# Altium PCB PCB_mecha-io-extension_2025-06-03.pcbdoc (part 1 of 2)
Units mil, origin at the board's own origin, x right, y up, seen from the top; angles counter-clockwise.
Board outline 3960 x 3230.45 mil, 2 copper layers (Top Layer, Bottom Layer); 20 components, 61 nets, 117 pads, 59 vias.
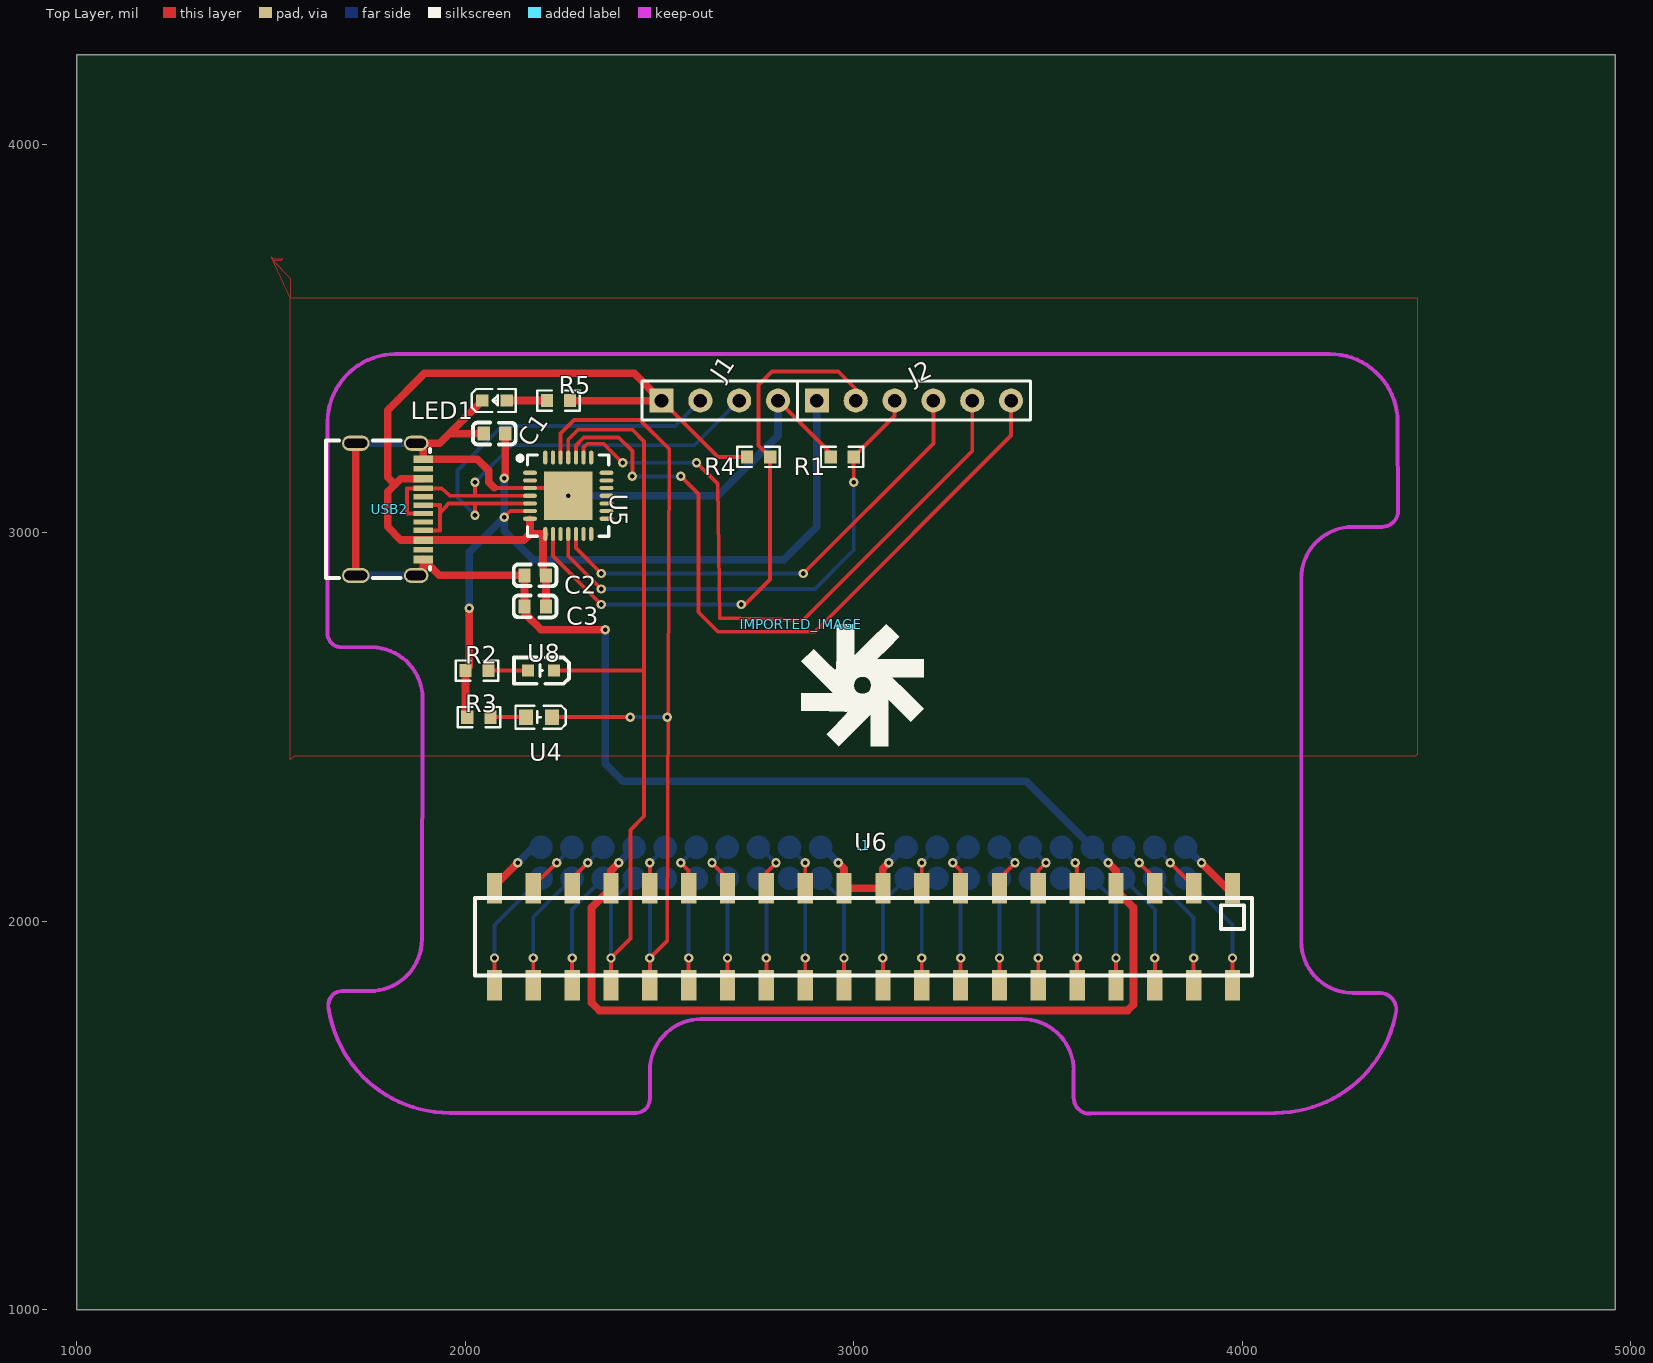
[diagram p0: Top Layer view]
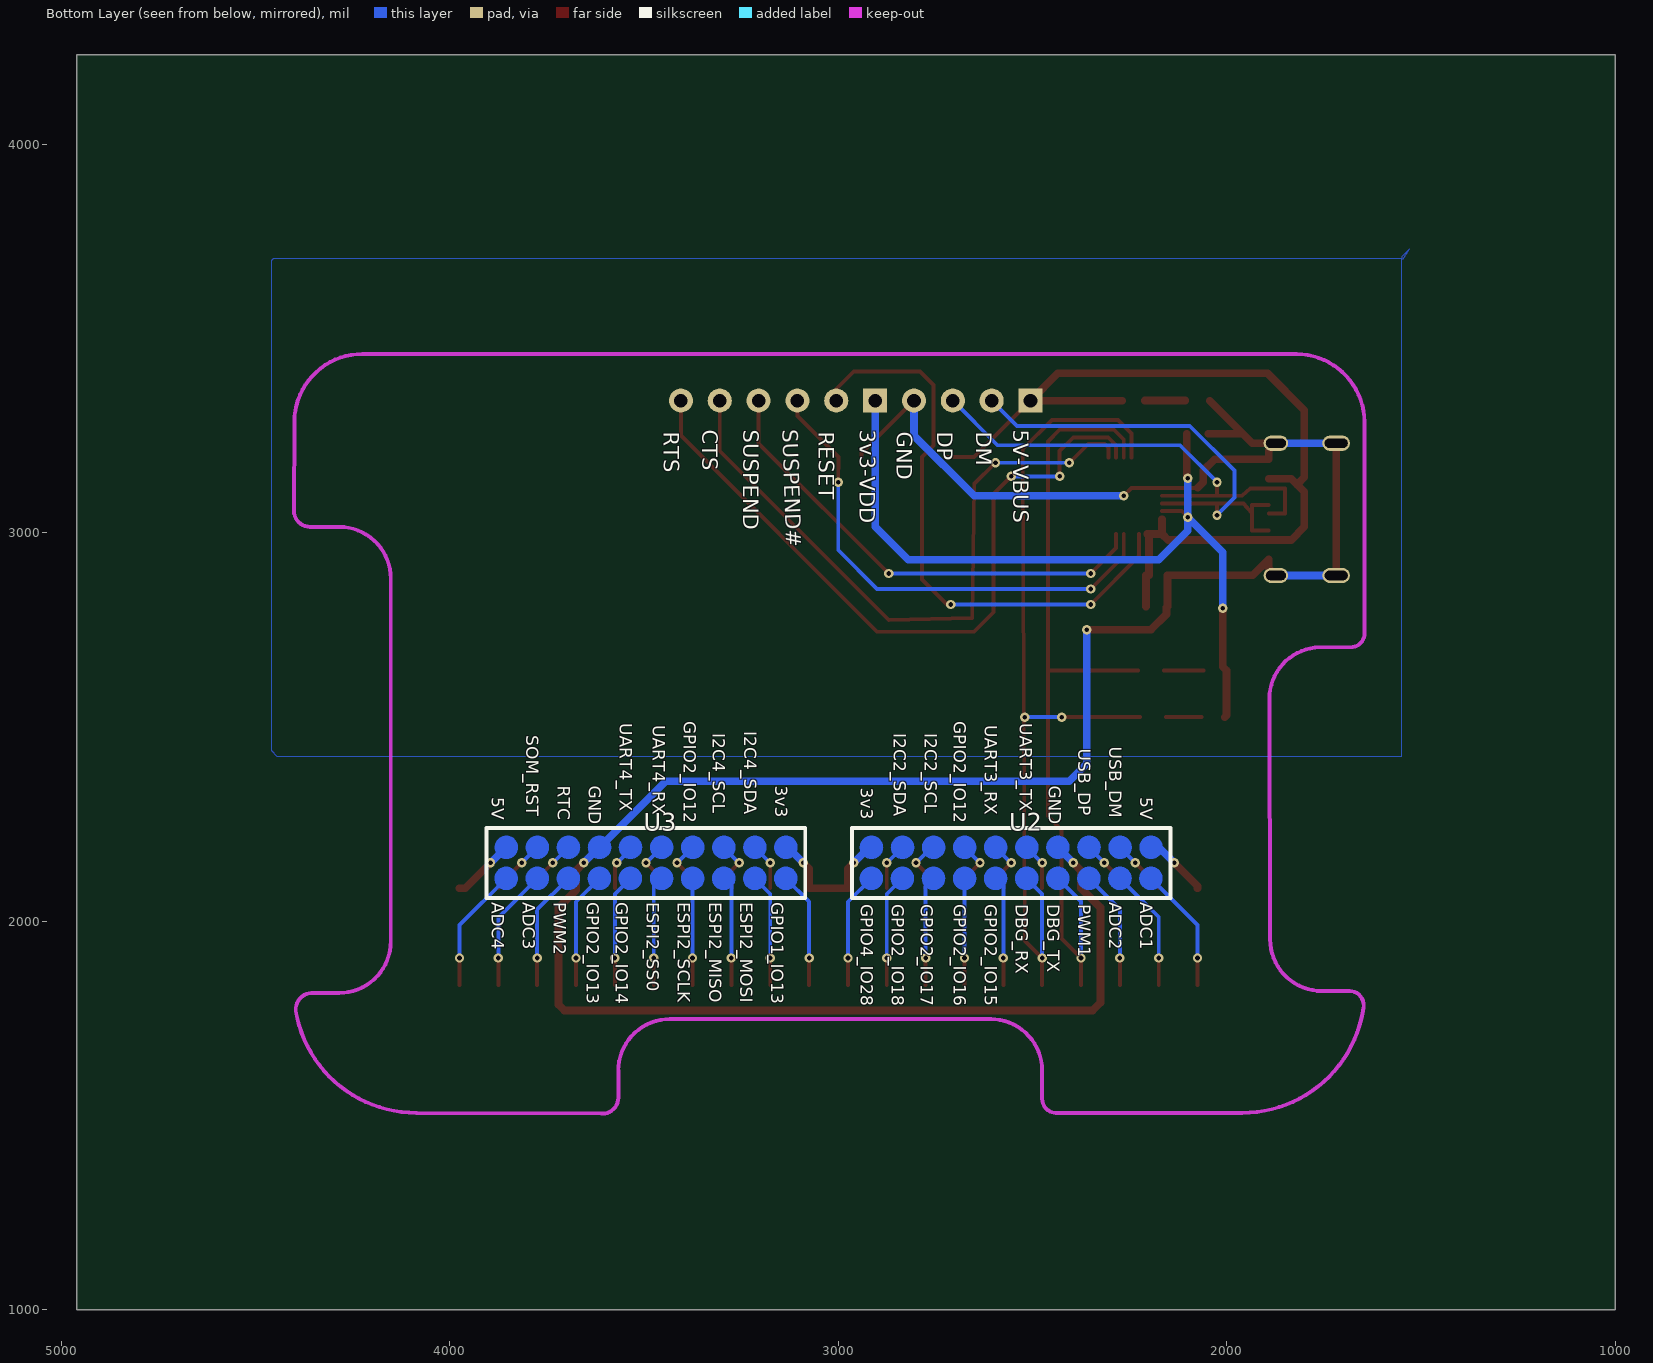
[diagram p1: Bottom Layer view, seen from below]

## Layer stack, top to bottom
Top Solder: solder mask 0.4, Solder Resist, Dk 3.5
Top Layer: signal copper 1.4
Dielectric1: dielectric 12.6, FR-4, Dk 4.8
Bottom Layer: signal copper 1.4
Bottom Solder: solder mask 0.4, Solder Resist, Dk 3.5

## Board outline
4960,1000 1000,1000 1000,4230.45 4960,4230.45

## Design rules (kind name [scope] priority, off if disabled: settings)
Clearance [All] p1: gap=10 ignorepadtopadclearanceinfootprint=FALSE except(0: Arc-Hole Track-Hole SMDPad-Hole THPad-Hole Via-Hole Fill-Hole Poly-Hole Region-Hole Text-Hole)
PolygonConnect [All] p1: connectstyle=Relief reliefconductorwidth=10 reliefentries=4 polygonreliefangle="90 Angle" airgapwidth=10
RoutingVias [All] p1: holewidth=28 width=50 viastyle="Through Hole" minholewidth=28 minwidth=50 maxholewidth=28 maxwidth=50
SolderMaskExpansion [All] p1: expansion=4 istentingtop=FALSE
Width [All] p1: maxlimit=10 minlimit=10 preferedwidth=10
30 further rules are at their usual default settings.

## Components (designator, comment, footprint, x,y, rotation, side; value= is the part's Value field where it differs from the comment)
.1 "_" ? 3025,2195.45 r0 top locked
C1 "4.7uF" C0603 2075,3255.45 r0 top
C2 "4.7uF" C0603 2180,2890.45 r0 top
C3 "4.7uF" C0603 2180,2810.45 r0 top
IMPORTED_IMAGE "Comment" IMPORTED_IMAGE 2865,2765.29 r0 top
J1 "HDR-M-2.54_1x4" HDR-M-2.54_1X4 2655,3340.45 r0 top
J2 "HDR-M-2.54_1x6" HDR-M-2.54_1X6 3155,3340.45 r0 top
LED1 "HL-PST-1608S9AC-04" LED0603-RD_RED 2075,3340.45 r0 top
R1 "10kΩ" R0603 2970,3195.45 r0 top
R2 "1kΩ" R0603 2030,2645.45 r180 top
R3 "1kΩ" R0603 2035,2525.45 r180 top
R4 "4.7kΩ" R0603 2755,3195.45 r180 top
R5 "R0603" R0603 2240,3340.45 r0 top
U2 "10x2-Pogo-Pins-Pads-2mm-Pitch" 10X2-POGO-PINS-PADS-2MM-PITCH 2555,2150.45 r0 bottom
U3 "10x2-Pogo-Pins-Pads-2mm-Pitch" 10X2-POGO-PINS-PADS-2MM-PITCH 3495,2150.45 r0 bottom
U4 "19-213/GHC-XS1T1N/5T" LED0603-FD_GREEN 2190,2525.45 r0 top
U5 "CP2102-GMR" WQFN-28_L5.0-W5.0-P0.50-BL-EP3.2 2265,3095.45 r270 top
U6 "mecha_gpio_40pin_header" MECHA_GPIO_40PIN_HEADER 3025,1955.45 r0 top
U8 "A-SP194B1C-C03-4T" LED0603-R-RD_BLUE 2195,2645.45 r180 top
USB2 "TYPE-C-31-M-23" USB-C-SMD_TYPE-C-31-M-23 1805,3060.45 r270 top

## Footprints (in the part's own frame and the unit in brackets; to place one, negate y for a bottom-side part, rotate by r counter-clockwise, add the part's x,y. Pads: shape width x height; smd on the part's side, far side on the other; paste and mask are expansions set on the pad)
10X2-POGO-PINS-PADS-2MM-PITCH [mil]
  Top Layer region: -390,-40 -389.96,-41.56 -389.84,-43.11 -389.63,-44.65 -389.35,-46.18 -388.99,-47.69 -388.55,-49.18 -388.03,-50.65 -387.43,-52.09 -386.76,-53.49 -386.02,-54.86 -385.2,-56.19 -384.32,-57.47 -383.38,-58.71 -382.37,-59.89 -381.29,-61.02 -380.16,-62.09 -378.98,-63.1 -377.75,-64.05 -376.47,-64.93 -375.14,-65.74 -373.77,-66.49 -372.37,-67.16 -370.93,-67.75 -369.46,-68.27 -367.97,-68.71 -366.46,-69.07 -364.93,-69.36 -363.38,-69.56 -361.83,-69.68 -360.28,-69.72 -358.72,-69.68 -357.17,-69.56 -355.63,-69.36 -354.1,-69.07 -352.58,-68.71 -351.09,-68.27 -349.62,-67.75 -348.18,-67.16 -346.78,-66.49 -345.41,-65.74 -344.09,-64.93 -342.8,-64.05 -341.57,-63.1 -340.39,-62.09 -339.26,-61.02 -338.19,-59.89 -337.18,-58.71 -336.23,-57.47 -335.35,-56.19 -334.53,-54.86 -333.79,-53.49 -333.12,-52.09 -332.53,-50.65 -332.01,-49.18 -331.56,-47.69 -331.2,-46.18 -330.92,-44.65 -330.71,-43.11 -330.59,-41.56 -330.55,-40 -330.59,-38.44 -330.71,-36.89 -330.92,-35.35 -331.2,-33.82 -331.56,-32.31 -332.01,-30.82 -332.53,-29.35 -333.12,-27.91 -333.79,-26.51 -334.53,-25.14 -335.35,-23.81 -336.23,-22.53 -337.18,-21.29 -338.19,-20.11 -339.26,-18.98 -340.39,-17.91 -341.57,-16.9 -342.8,-15.95 -344.09,-15.07 -345.41,-14.26 -346.78,-13.51 -348.18,-12.84 -349.62,-12.25 -351.09,-11.73 -352.58,-11.29 -354.1,-10.93 -355.63,-10.64 -357.17,-10.44 -358.72,-10.32 -360.28,-10.28 -361.83,-10.32 -363.38,-10.44 -364.93,-10.64 -366.46,-10.93 -367.97,-11.29 -369.46,-11.73 -370.93,-12.25 -372.37,-12.84 -373.77,-13.51 -375.14,-14.26 -376.47,-15.07 -377.75,-15.95 -378.98,-16.9 -380.16,-17.91 -381.29,-18.98 -382.37,-20.11 -383.38,-21.29 -384.32,-22.53 -385.2,-23.81 -386.02,-25.14 -386.76,-26.51 -387.43,-27.91 -388.03,-29.35 -388.55,-30.82 -388.99,-32.31 -389.35,-33.82 -389.63,-35.35 -389.84,-36.89 -389.96,-38.44
  Top Layer region: -310.28,-40 -310.24,-41.56 -310.11,-43.11 -309.91,-44.65 -309.63,-46.18 -309.26,-47.69 -308.82,-49.18 -308.3,-50.65 -307.71,-52.09 -307.04,-53.49 -306.29,-54.86 -305.48,-56.19 -304.6,-57.47 -303.65,-58.71 -302.64,-59.89 -301.57,-61.02 -300.44,-62.09 -299.26,-63.1 -298.02,-64.05 -296.74,-64.93 -295.41,-65.74 -294.05,-66.49 -292.64,-67.16 -291.2,-67.75 -289.74,-68.27 -288.24,-68.71 -286.73,-69.07 -285.2,-69.36 -283.66,-69.56 -282.11,-69.68 -280.55,-69.72 -279,-69.68 -277.44,-69.56 -275.9,-69.36 -274.37,-69.07 -272.86,-68.71 -271.37,-68.27 -269.9,-67.75 -268.46,-67.16 -267.06,-66.49 -265.69,-65.74 -264.36,-64.93 -263.08,-64.05 -261.85,-63.1 -260.66,-62.09 -259.53,-61.02 -258.46,-59.89 -257.45,-58.71 -256.5,-57.47 -255.62,-56.19 -254.81,-54.86 -254.07,-53.49 -253.4,-52.09 -252.8,-50.65 -252.28,-49.18 -251.84,-47.69 -251.48,-46.18 -251.19,-44.65 -250.99,-43.11 -250.87,-41.56 -250.83,-40 -250.87,-38.44 -250.99,-36.89 -251.19,-35.35 -251.48,-33.82 -251.84,-32.31 -252.28,-30.82 -252.8,-29.35 -253.4,-27.91 -254.07,-26.51 -254.81,-25.14 -255.62,-23.81 -256.5,-22.53 -257.45,-21.29 -258.46,-20.11 -259.53,-18.98 -260.66,-17.91 -261.85,-16.9 -263.08,-15.95 -264.36,-15.07 -265.69,-14.26 -267.06,-13.51 -268.46,-12.84 -269.9,-12.25 -271.37,-11.73 -272.86,-11.29 -274.37,-10.93 -275.9,-10.64 -277.44,-10.44 -279,-10.32 -280.55,-10.28 -282.11,-10.32 -283.66,-10.44 -285.2,-10.64 -286.73,-10.93 -288.24,-11.29 -289.74,-11.73 -291.2,-12.25 -292.64,-12.84 -294.05,-13.51 -295.41,-14.26 -296.74,-15.07 -298.02,-15.95 -299.26,-16.9 -300.44,-17.91 -301.57,-18.98 -302.64,-20.11 -303.65,-21.29 -304.6,-22.53 -305.48,-23.81 -306.29,-25.14 -307.04,-26.51 -307.71,-27.91 -308.3,-29.35 -308.82,-30.82 -309.26,-32.31 -309.63,-33.82 -309.91,-35.35 -310.11,-36.89 -310.24,-38.44
  Top Layer region: -230.28,-40 -230.24,-41.56 -230.11,-43.11 -229.91,-44.65 -229.63,-46.18 -229.26,-47.69 -228.82,-49.18 -228.3,-50.65 -227.71,-52.09 -227.04,-53.49 -226.29,-54.86 -225.48,-56.19 -224.6,-57.47 -223.65,-58.71 -222.64,-59.89 -221.57,-61.02 -220.44,-62.09 -219.26,-63.1 -218.02,-64.05 -216.74,-64.93 -215.41,-65.74 -214.05,-66.49 -212.64,-67.16 -211.2,-67.75 -209.74,-68.27 -208.24,-68.71 -206.73,-69.07 -205.2,-69.36 -203.66,-69.56 -202.11,-69.68 -200.55,-69.72 -199,-69.68 -197.44,-69.56 -195.9,-69.36 -194.37,-69.07 -192.86,-68.71 -191.37,-68.27 -189.9,-67.75 -188.46,-67.16 -187.06,-66.49 -185.69,-65.74 -184.36,-64.93 -183.08,-64.05 -181.85,-63.1 -180.66,-62.09 -179.53,-61.02 -178.46,-59.89 -177.45,-58.71 -176.5,-57.47 -175.62,-56.19 -174.81,-54.86 -174.07,-53.49 -173.4,-52.09 -172.8,-50.65 -172.28,-49.18 -171.84,-47.69 -171.48,-46.18 -171.19,-44.65 -170.99,-43.11 -170.87,-41.56 -170.83,-40 -170.87,-38.44 -170.99,-36.89 -171.19,-35.35 -171.48,-33.82 -171.84,-32.31 -172.28,-30.82 -172.8,-29.35 -173.4,-27.91 -174.07,-26.51 -174.81,-25.14 -175.62,-23.81 -176.5,-22.53 -177.45,-21.29 -178.46,-20.11 -179.53,-18.98 -180.66,-17.91 -181.85,-16.9 -183.08,-15.95 -184.36,-15.07 -185.69,-14.26 -187.06,-13.51 -188.46,-12.84 -189.9,-12.25 -191.37,-11.73 -192.86,-11.29 -194.37,-10.93 -195.9,-10.64 -197.44,-10.44 -199,-10.32 -200.55,-10.28 -202.11,-10.32 -203.66,-10.44 -205.2,-10.64 -206.73,-10.93 -208.24,-11.29 -209.74,-11.73 -211.2,-12.25 -212.64,-12.84 -214.05,-13.51 -215.41,-14.26 -216.74,-15.07 -218.02,-15.95 -219.26,-16.9 -220.44,-17.91 -221.57,-18.98 -222.64,-20.11 -223.65,-21.29 -224.6,-22.53 -225.48,-23.81 -226.29,-25.14 -227.04,-26.51 -227.71,-27.91 -228.3,-29.35 -228.82,-30.82 -229.26,-32.31 -229.63,-33.82 -229.91,-35.35 -230.11,-36.89 -230.24,-38.44
  Top Layer region: -150.28,-40 -150.24,-41.56 -150.11,-43.11 -149.91,-44.65 -149.63,-46.18 -149.26,-47.69 -148.82,-49.18 -148.3,-50.65 -147.71,-52.09 -147.04,-53.49 -146.29,-54.86 -145.48,-56.19 -144.6,-57.47 -143.65,-58.71 -142.64,-59.89 -141.57,-61.02 -140.44,-62.09 -139.26,-63.1 -138.02,-64.05 -136.74,-64.93 -135.41,-65.74 -134.05,-66.49 -132.64,-67.16 -131.2,-67.75 -129.74,-68.27 -128.24,-68.71 -126.73,-69.07 -125.2,-69.36 -123.66,-69.56 -122.11,-69.68 -120.55,-69.72 -119,-69.68 -117.44,-69.56 -115.9,-69.36 -114.37,-69.07 -112.86,-68.71 -111.37,-68.27 -109.9,-67.75 -108.46,-67.16 -107.06,-66.49 -105.69,-65.74 -104.36,-64.93 -103.08,-64.05 -101.85,-63.1 -100.66,-62.09 -99.53,-61.02 -98.46,-59.89 -97.45,-58.71 -96.5,-57.47 -95.62,-56.19 -94.81,-54.86 -94.07,-53.49 -93.4,-52.09 -92.8,-50.65 -92.28,-49.18 -91.84,-47.69 -91.48,-46.18 -91.19,-44.65 -90.99,-43.11 -90.87,-41.56 -90.83,-40 -90.87,-38.44 -90.99,-36.89 -91.19,-35.35 -91.48,-33.82 -91.84,-32.31 -92.28,-30.82 -92.8,-29.35 -93.4,-27.91 -94.07,-26.51 -94.81,-25.14 -95.62,-23.81 -96.5,-22.53 -97.45,-21.29 -98.46,-20.11 -99.53,-18.98 -100.66,-17.91 -101.85,-16.9 -103.08,-15.95 -104.36,-15.07 -105.69,-14.26 -107.06,-13.51 -108.46,-12.84 -109.9,-12.25 -111.37,-11.73 -112.86,-11.29 -114.37,-10.93 -115.9,-10.64 -117.44,-10.44 -119,-10.32 -120.55,-10.28 -122.11,-10.32 -123.66,-10.44 -125.2,-10.64 -126.73,-10.93 -128.24,-11.29 -129.74,-11.73 -131.2,-12.25 -132.64,-12.84 -134.05,-13.51 -135.41,-14.26 -136.74,-15.07 -138.02,-15.95 -139.26,-16.9 -140.44,-17.91 -141.57,-18.98 -142.64,-20.11 -143.65,-21.29 -144.6,-22.53 -145.48,-23.81 -146.29,-25.14 -147.04,-26.51 -147.71,-27.91 -148.3,-29.35 -148.82,-30.82 -149.26,-32.31 -149.63,-33.82 -149.91,-35.35 -150.11,-36.89 -150.24,-38.44
  Top Layer region: -70.28,-40 -70.24,-41.56 -70.11,-43.11 -69.91,-44.65 -69.63,-46.18 -69.26,-47.69 -68.82,-49.18 -68.3,-50.65 -67.71,-52.09 -67.04,-53.49 -66.29,-54.86 -65.48,-56.19 -64.6,-57.47 -63.65,-58.71 -62.64,-59.89 -61.57,-61.02 -60.44,-62.09 -59.26,-63.1 -58.02,-64.05 -56.74,-64.93 -55.41,-65.74 -54.05,-66.49 -52.64,-67.16 -51.2,-67.75 -49.74,-68.27 -48.24,-68.71 -46.73,-69.07 -45.2,-69.36 -43.66,-69.56 -42.11,-69.68 -40.55,-69.72 -39,-69.68 -37.44,-69.56 -35.9,-69.36 -34.37,-69.07 -32.86,-68.71 -31.37,-68.27 -29.9,-67.75 -28.46,-67.16 -27.06,-66.49 -25.69,-65.74 -24.36,-64.93 -23.08,-64.05 -21.85,-63.1 -20.66,-62.09 -19.53,-61.02 -18.46,-59.89 -17.45,-58.71 -16.5,-57.47 -15.62,-56.19 -14.81,-54.86 -14.07,-53.49 -13.4,-52.09 -12.8,-50.65 -12.28,-49.18 -11.84,-47.69 -11.48,-46.18 -11.19,-44.65 -10.99,-43.11 -10.87,-41.56 -10.83,-40 -10.87,-38.44 -10.99,-36.89 -11.19,-35.35 -11.48,-33.82 -11.84,-32.31 -12.28,-30.82 -12.8,-29.35 -13.4,-27.91 -14.07,-26.51 -14.81,-25.14 -15.62,-23.81 -16.5,-22.53 -17.45,-21.29 -18.46,-20.11 -19.53,-18.98 -20.66,-17.91 -21.85,-16.9 -23.08,-15.95 -24.36,-15.07 -25.69,-14.26 -27.06,-13.51 -28.46,-12.84 -29.9,-12.25 -31.37,-11.73 -32.86,-11.29 -34.37,-10.93 -35.9,-10.64 -37.44,-10.44 -39,-10.32 -40.55,-10.28 -42.11,-10.32 -43.66,-10.44 -45.2,-10.64 -46.73,-10.93 -48.24,-11.29 -49.74,-11.73 -51.2,-12.25 -52.64,-12.84 -54.05,-13.51 -55.41,-14.26 -56.74,-15.07 -58.02,-15.95 -59.26,-16.9 -60.44,-17.91 -61.57,-18.98 -62.64,-20.11 -63.65,-21.29 -64.6,-22.53 -65.48,-23.81 -66.29,-25.14 -67.04,-26.51 -67.71,-27.91 -68.3,-29.35 -68.82,-30.82 -69.26,-32.31 -69.63,-33.82 -69.91,-35.35 -70.11,-36.89 -70.24,-38.44
  Top Layer region: 10,-40 10.04,-41.56 10.16,-43.11 10.37,-44.65 10.65,-46.18 11.01,-47.69 11.45,-49.18 11.97,-50.65 12.57,-52.09 13.24,-53.49 13.98,-54.86 14.8,-56.19 15.68,-57.47 16.62,-58.71 17.63,-59.89 18.71,-61.02 19.84,-62.09 21.02,-63.1 22.25,-64.05 23.53,-64.93 24.86,-65.74 26.23,-66.49 27.63,-67.16 29.07,-67.75 30.54,-68.27 32.03,-68.71 33.54,-69.07 35.07,-69.36 36.62,-69.56 38.17,-69.68 39.72,-69.72 41.28,-69.68 42.83,-69.56 44.37,-69.36 45.9,-69.07 47.42,-68.71 48.91,-68.27 50.38,-67.75 51.82,-67.16 53.22,-66.49 54.59,-65.74 55.91,-64.93 57.2,-64.05 58.43,-63.1 59.61,-62.09 60.74,-61.02 61.81,-59.89 62.82,-58.71 63.77,-57.47 64.65,-56.19 65.47,-54.86 66.21,-53.49 66.88,-52.09 67.47,-50.65 67.99,-49.18 68.44,-47.69 68.8,-46.18 69.08,-44.65 69.29,-43.11 69.41,-41.56 69.45,-40 69.41,-38.44 69.29,-36.89 69.08,-35.35 68.8,-33.82 68.44,-32.31 67.99,-30.82 67.47,-29.35 66.88,-27.91 66.21,-26.51 65.47,-25.14 64.65,-23.81 63.77,-22.53 62.82,-21.29 61.81,-20.11 60.74,-18.98 59.61,-17.91 58.43,-16.9 57.2,-15.95 55.91,-15.07 54.59,-14.26 53.22,-13.51 51.82,-12.84 50.38,-12.25 48.91,-11.73 47.42,-11.29 45.9,-10.93 44.37,-10.64 42.83,-10.44 41.28,-10.32 39.72,-10.28 38.17,-10.32 36.62,-10.44 35.07,-10.64 33.54,-10.93 32.03,-11.29 30.54,-11.73 29.07,-12.25 27.63,-12.84 26.23,-13.51 24.86,-14.26 23.53,-15.07 22.25,-15.95 21.02,-16.9 19.84,-17.91 18.71,-18.98 17.63,-20.11 16.62,-21.29 15.68,-22.53 14.8,-23.81 13.98,-25.14 13.24,-26.51 12.57,-27.91 11.97,-29.35 11.45,-30.82 11.01,-32.31 10.65,-33.82 10.37,-35.35 10.16,-36.89 10.04,-38.44
  Top Layer region: 89.72,-40 89.76,-41.56 89.89,-43.11 90.09,-44.65 90.37,-46.18 90.74,-47.69 91.18,-49.18 91.7,-50.65 92.29,-52.09 92.96,-53.49 93.71,-54.86 94.52,-56.19 95.4,-57.47 96.35,-58.71 97.36,-59.89 98.43,-61.02 99.56,-62.09 100.74,-63.1 101.98,-64.05 103.26,-64.93 104.59,-65.74 105.95,-66.49 107.36,-67.16 108.8,-67.75 110.26,-68.27 111.76,-68.71 113.27,-69.07 114.8,-69.36 116.34,-69.56 117.89,-69.68 119.45,-69.72 121,-69.68 122.56,-69.56 124.1,-69.36 125.63,-69.07 127.14,-68.71 128.63,-68.27 130.1,-67.75 131.54,-67.16 132.94,-66.49 134.31,-65.74 135.64,-64.93 136.92,-64.05 138.15,-63.1 139.34,-62.09 140.47,-61.02 141.54,-59.89 142.55,-58.71 143.5,-57.47 144.38,-56.19 145.19,-54.86 145.93,-53.49 146.6,-52.09 147.2,-50.65 147.72,-49.18 148.16,-47.69 148.52,-46.18 148.81,-44.65 149.01,-43.11 149.13,-41.56 149.17,-40 149.13,-38.44 149.01,-36.89 148.81,-35.35 148.52,-33.82 148.16,-32.31 147.72,-30.82 147.2,-29.35 146.6,-27.91 145.93,-26.51 145.19,-25.14 144.38,-23.81 143.5,-22.53 142.55,-21.29 141.54,-20.11 140.47,-18.98 139.34,-17.91 138.15,-16.9 136.92,-15.95 135.64,-15.07 134.31,-14.26 132.94,-13.51 131.54,-12.84 130.1,-12.25 128.63,-11.73 127.14,-11.29 125.63,-10.93 124.1,-10.64 122.56,-10.44 121,-10.32 119.45,-10.28 117.89,-10.32 116.34,-10.44 114.8,-10.64 113.27,-10.93 111.76,-11.29 110.26,-11.73 108.8,-12.25 107.36,-12.84 105.95,-13.51 104.59,-14.26 103.26,-15.07 101.98,-15.95 100.74,-16.9 99.56,-17.91 98.43,-18.98 97.36,-20.11 96.35,-21.29 95.4,-22.53 94.52,-23.81 93.71,-25.14 92.96,-26.51 92.29,-27.91 91.7,-29.35 91.18,-30.82 90.74,-32.31 90.37,-33.82 90.09,-35.35 89.89,-36.89 89.76,-38.44
  Top Layer region: 169.72,-40 169.76,-41.56 169.89,-43.11 170.09,-44.65 170.37,-46.18 170.74,-47.69 171.18,-49.18 171.7,-50.65 172.29,-52.09 172.96,-53.49 173.71,-54.86 174.52,-56.19 175.4,-57.47 176.35,-58.71 177.36,-59.89 178.43,-61.02 179.56,-62.09 180.74,-63.1 181.98,-64.05 183.26,-64.93 184.59,-65.74 185.95,-66.49 187.36,-67.16 188.8,-67.75 190.26,-68.27 191.76,-68.71 193.27,-69.07 194.8,-69.36 196.34,-69.56 197.89,-69.68 199.45,-69.72 201,-69.68 202.56,-69.56 204.1,-69.36 205.63,-69.07 207.14,-68.71 208.63,-68.27 210.1,-67.75 211.54,-67.16 212.94,-66.49 214.31,-65.74 215.64,-64.93 216.92,-64.05 218.15,-63.1 219.34,-62.09 220.47,-61.02 221.54,-59.89 222.55,-58.71 223.5,-57.47 224.38,-56.19 225.19,-54.86 225.93,-53.49 226.6,-52.09 227.2,-50.65 227.72,-49.18 228.16,-47.69 228.52,-46.18 228.81,-44.65 229.01,-43.11 229.13,-41.56 229.17,-40 229.13,-38.44 229.01,-36.89 228.81,-35.35 228.52,-33.82 228.16,-32.31 227.72,-30.82 227.2,-29.35 226.6,-27.91 225.93,-26.51 225.19,-25.14 224.38,-23.81 223.5,-22.53 222.55,-21.29 221.54,-20.11 220.47,-18.98 219.34,-17.91 218.15,-16.9 216.92,-15.95 215.64,-15.07 214.31,-14.26 212.94,-13.51 211.54,-12.84 210.1,-12.25 208.63,-11.73 207.14,-11.29 205.63,-10.93 204.1,-10.64 202.56,-10.44 201,-10.32 199.45,-10.28 197.89,-10.32 196.34,-10.44 194.8,-10.64 193.27,-10.93 191.76,-11.29 190.26,-11.73 188.8,-12.25 187.36,-12.84 185.95,-13.51 184.59,-14.26 183.26,-15.07 181.98,-15.95 180.74,-16.9 179.56,-17.91 178.43,-18.98 177.36,-20.11 176.35,-21.29 175.4,-22.53 174.52,-23.81 173.71,-25.14 172.96,-26.51 172.29,-27.91 171.7,-29.35 171.18,-30.82 170.74,-32.31 170.37,-33.82 170.09,-35.35 169.89,-36.89 169.76,-38.44
  Top Layer region: 249.72,-40 249.76,-41.56 249.89,-43.11 250.09,-44.65 250.37,-46.18 250.74,-47.69 251.18,-49.18 251.7,-50.65 252.29,-52.09 252.96,-53.49 253.71,-54.86 254.52,-56.19 255.4,-57.47 256.35,-58.71 257.36,-59.89 258.43,-61.02 259.56,-62.09 260.74,-63.1 261.98,-64.05 263.26,-64.93 264.59,-65.74 265.95,-66.49 267.36,-67.16 268.8,-67.75 270.26,-68.27 271.76,-68.71 273.27,-69.07 274.8,-69.36 276.34,-69.56 277.89,-69.68 279.45,-69.72 281,-69.68 282.56,-69.56 284.1,-69.36 285.63,-69.07 287.14,-68.71 288.63,-68.27 290.1,-67.75 291.54,-67.16 292.94,-66.49 294.31,-65.74 295.64,-64.93 296.92,-64.05 298.15,-63.1 299.34,-62.09 300.47,-61.02 301.54,-59.89 302.55,-58.71 303.5,-57.47 304.38,-56.19 305.19,-54.86 305.93,-53.49 306.6,-52.09 307.2,-50.65 307.72,-49.18 308.16,-47.69 308.52,-46.18 308.81,-44.65 309.01,-43.11 309.13,-41.56 309.17,-40 309.13,-38.44 309.01,-36.89 308.81,-35.35 308.52,-33.82 308.16,-32.31 307.72,-30.82 307.2,-29.35 306.6,-27.91 305.93,-26.51 305.19,-25.14 304.38,-23.81 303.5,-22.53 302.55,-21.29 301.54,-20.11 300.47,-18.98 299.34,-17.91 298.15,-16.9 296.92,-15.95 295.64,-15.07 294.31,-14.26 292.94,-13.51 291.54,-12.84 290.1,-12.25 288.63,-11.73 287.14,-11.29 285.63,-10.93 284.1,-10.64 282.56,-10.44 281,-10.32 279.45,-10.28 277.89,-10.32 276.34,-10.44 274.8,-10.64 273.27,-10.93 271.76,-11.29 270.26,-11.73 268.8,-12.25 267.36,-12.84 265.95,-13.51 264.59,-14.26 263.26,-15.07 261.98,-15.95 260.74,-16.9 259.56,-17.91 258.43,-18.98 257.36,-20.11 256.35,-21.29 255.4,-22.53 254.52,-23.81 253.71,-25.14 252.96,-26.51 252.29,-27.91 251.7,-29.35 251.18,-30.82 250.74,-32.31 250.37,-33.82 250.09,-35.35 249.89,-36.89 249.76,-38.44
  Top Layer region: 329.72,-40 329.76,-41.56 329.89,-43.11 330.09,-44.65 330.37,-46.18 330.74,-47.69 331.18,-49.18 331.7,-50.65 332.29,-52.09 332.96,-53.49 333.71,-54.86 334.52,-56.19 335.4,-57.47 336.35,-58.71 337.36,-59.89 338.43,-61.02 339.56,-62.09 340.74,-63.1 341.98,-64.05 343.26,-64.93 344.59,-65.74 345.95,-66.49 347.36,-67.16 348.8,-67.75 350.26,-68.27 351.76,-68.71 353.27,-69.07 354.8,-69.36 356.34,-69.56 357.89,-69.68 359.45,-69.72 361,-69.68 362.56,-69.56 364.1,-69.36 365.63,-69.07 367.14,-68.71 368.63,-68.27 370.1,-67.75 371.54,-67.16 372.94,-66.49 374.31,-65.74 375.64,-64.93 376.92,-64.05 378.15,-63.1 379.34,-62.09 380.47,-61.02 381.54,-59.89 382.55,-58.71 383.5,-57.47 384.38,-56.19 385.19,-54.86 385.93,-53.49 386.6,-52.09 387.2,-50.65 387.72,-49.18 388.16,-47.69 388.52,-46.18 388.81,-44.65 389.01,-43.11 389.13,-41.56 389.17,-40 389.13,-38.44 389.01,-36.89 388.81,-35.35 388.52,-33.82 388.16,-32.31 387.72,-30.82 387.2,-29.35 386.6,-27.91 385.93,-26.51 385.19,-25.14 384.38,-23.81 383.5,-22.53 382.55,-21.29 381.54,-20.11 380.47,-18.98 379.34,-17.91 378.15,-16.9 376.92,-15.95 375.64,-15.07 374.31,-14.26 372.94,-13.51 371.54,-12.84 370.1,-12.25 368.63,-11.73 367.14,-11.29 365.63,-10.93 364.1,-10.64 362.56,-10.44 361,-10.32 359.45,-10.28 357.89,-10.32 356.34,-10.44 354.8,-10.64 353.27,-10.93 351.76,-11.29 350.26,-11.73 348.8,-12.25 347.36,-12.84 345.95,-13.51 344.59,-14.26 343.26,-15.07 341.98,-15.95 340.74,-16.9 339.56,-17.91 338.43,-18.98 337.36,-20.11 336.35,-21.29 335.4,-22.53 334.52,-23.81 333.71,-25.14 332.96,-26.51 332.29,-27.91 331.7,-29.35 331.18,-30.82 330.74,-32.31 330.37,-33.82 330.09,-35.35 329.89,-36.89 329.76,-38.44
  Top Layer region: 330,40 330.04,38.44 330.16,36.89 330.37,35.35 330.65,33.82 331.01,32.31 331.45,30.82 331.97,29.35 332.57,27.91 333.24,26.51 333.98,25.14 334.8,23.81 335.68,22.53 336.62,21.29 337.63,20.11 338.71,18.98 339.84,17.91 341.02,16.9 342.25,15.95 343.53,15.07 344.86,14.26 346.23,13.51 347.63,12.84 349.07,12.25 350.54,11.73 352.03,11.29 353.54,10.93 355.07,10.64 356.62,10.44 358.17,10.32 359.72,10.28 361.28,10.32 362.83,10.44 364.37,10.64 365.9,10.93 367.42,11.29 368.91,11.73 370.38,12.25 371.82,12.84 373.22,13.51 374.59,14.26 375.91,15.07 377.2,15.95 378.43,16.9 379.61,17.91 380.74,18.98 381.81,20.11 382.82,21.29 383.77,22.53 384.65,23.81 385.47,25.14 386.21,26.51 386.88,27.91 387.47,29.35 387.99,30.82 388.44,32.31 388.8,33.82 389.08,35.35 389.29,36.89 389.41,38.44 389.45,40 389.41,41.56 389.29,43.11 389.08,44.65 388.8,46.18 388.44,47.69 387.99,49.18 387.47,50.65 386.88,52.09 386.21,53.49 385.47,54.86 384.65,56.19 383.77,57.47 382.82,58.71 381.81,59.89 380.74,61.02 379.61,62.09 378.43,63.1 377.2,64.05 375.91,64.93 374.59,65.74 373.22,66.49 371.82,67.16 370.38,67.75 368.91,68.27 367.42,68.71 365.9,69.07 364.37,69.36 362.83,69.56 361.28,69.68 359.72,69.72 358.17,69.68 356.62,69.56 355.07,69.36 353.54,69.07 352.03,68.71 350.54,68.27 349.07,67.75 347.63,67.16 346.23,66.49 344.86,65.74 343.53,64.93 342.25,64.05 341.02,63.1 339.84,62.09 338.71,61.02 337.63,59.89 336.62,58.71 335.68,57.47 334.8,56.19 333.98,54.86 333.24,53.49 332.57,52.09 331.97,50.65 331.45,49.18 331.01,47.69 330.65,46.18 330.37,44.65 330.16,43.11 330.04,41.56
  Top Layer region: 250,40 250.04,38.44 250.16,36.89 250.37,35.35 250.65,33.82 251.01,32.31 251.45,30.82 251.97,29.35 252.57,27.91 253.24,26.51 253.98,25.14 254.8,23.81 255.68,22.53 256.62,21.29 257.63,20.11 258.71,18.98 259.84,17.91 261.02,16.9 262.25,15.95 263.53,15.07 264.86,14.26 266.23,13.51 267.63,12.84 269.07,12.25 270.54,11.73 272.03,11.29 273.54,10.93 275.07,10.64 276.62,10.44 278.17,10.32 279.72,10.28 281.28,10.32 282.83,10.44 284.37,10.64 285.9,10.93 287.42,11.29 288.91,11.73 290.38,12.25 291.82,12.84 293.22,13.51 294.59,14.26 295.91,15.07 297.2,15.95 298.43,16.9 299.61,17.91 300.74,18.98 301.81,20.11 302.82,21.29 303.77,22.53 304.65,23.81 305.47,25.14 306.21,26.51 306.88,27.91 307.47,29.35 307.99,30.82 308.44,32.31 308.8,33.82 309.08,35.35 309.29,36.89 309.41,38.44 309.45,40 309.41,41.56 309.29,43.11 309.08,44.65 308.8,46.18 308.44,47.69 307.99,49.18 307.47,50.65 306.88,52.09 306.21,53.49 305.47,54.86 304.65,56.19 303.77,57.47 302.82,58.71 301.81,59.89 300.74,61.02 299.61,62.09 298.43,63.1 297.2,64.05 295.91,64.93 294.59,65.74 293.22,66.49 291.82,67.16 290.38,67.75 288.91,68.27 287.42,68.71 285.9,69.07 284.37,69.36 282.83,69.56 281.28,69.68 279.72,69.72 278.17,69.68 276.62,69.56 275.07,69.36 273.54,69.07 272.03,68.71 270.54,68.27 269.07,67.75 267.63,67.16 266.23,66.49 264.86,65.74 263.53,64.93 262.25,64.05 261.02,63.1 259.84,62.09 258.71,61.02 257.63,59.89 256.62,58.71 255.68,57.47 254.8,56.19 253.98,54.86 253.24,53.49 252.57,52.09 251.97,50.65 251.45,49.18 251.01,47.69 250.65,46.18 250.37,44.65 250.16,43.11 250.04,41.56
  Top Layer region: 170,40 170.04,38.44 170.16,36.89 170.37,35.35 170.65,33.82 171.01,32.31 171.45,30.82 171.97,29.35 172.57,27.91 173.24,26.51 173.98,25.14 174.8,23.81 175.68,22.53 176.62,21.29 177.63,20.11 178.71,18.98 179.84,17.91 181.02,16.9 182.25,15.95 183.53,15.07 184.86,14.26 186.23,13.51 187.63,12.84 189.07,12.25 190.54,11.73 192.03,11.29 193.54,10.93 195.07,10.64 196.62,10.44 198.17,10.32 199.72,10.28 201.28,10.32 202.83,10.44 204.37,10.64 205.9,10.93 207.42,11.29 208.91,11.73 210.38,12.25 211.82,12.84 213.22,13.51 214.59,14.26 215.91,15.07 217.2,15.95 218.43,16.9 219.61,17.91 220.74,18.98 221.81,20.11 222.82,21.29 223.77,22.53 224.65,23.81 225.47,25.14 226.21,26.51 226.88,27.91 227.47,29.35 227.99,30.82 228.44,32.31 228.8,33.82 229.08,35.35 229.29,36.89 229.41,38.44 229.45,40 229.41,41.56 229.29,43.11 229.08,44.65 228.8,46.18 228.44,47.69 227.99,49.18 227.47,50.65 226.88,52.09 226.21,53.49 225.47,54.86 224.65,56.19 223.77,57.47 222.82,58.71 221.81,59.89 220.74,61.02 219.61,62.09 218.43,63.1 217.2,64.05 215.91,64.93 214.59,65.74 213.22,66.49 211.82,67.16 210.38,67.75 208.91,68.27 207.42,68.71 205.9,69.07 204.37,69.36 202.83,69.56 201.28,69.68 199.72,69.72 198.17,69.68 196.62,69.56 195.07,69.36 193.54,69.07 192.03,68.71 190.54,68.27 189.07,67.75 187.63,67.16 186.23,66.49 184.86,65.74 183.53,64.93 182.25,64.05 181.02,63.1 179.84,62.09 178.71,61.02 177.63,59.89 176.62,58.71 175.68,57.47 174.8,56.19 173.98,54.86 173.24,53.49 172.57,52.09 171.97,50.65 171.45,49.18 171.01,47.69 170.65,46.18 170.37,44.65 170.16,43.11 170.04,41.56
  Top Layer region: 90,40 90.04,38.44 90.16,36.89 90.37,35.35 90.65,33.82 91.01,32.31 91.45,30.82 91.97,29.35 92.57,27.91 93.24,26.51 93.98,25.14 94.8,23.81 95.68,22.53 96.62,21.29 97.63,20.11 98.71,18.98 99.84,17.91 101.02,16.9 102.25,15.95 103.53,15.07 104.86,14.26 106.23,13.51 107.63,12.84 109.07,12.25 110.54,11.73 112.03,11.29 113.54,10.93 115.07,10.64 116.62,10.44 118.17,10.32 119.72,10.28 121.28,10.32 122.83,10.44 124.37,10.64 125.9,10.93 127.42,11.29 128.91,11.73 130.38,12.25 131.82,12.84 133.22,13.51 134.59,14.26 135.91,15.07 137.2,15.95 138.43,16.9 139.61,17.91 140.74,18.98 141.81,20.11 142.82,21.29 143.77,22.53 144.65,23.81 145.47,25.14 146.21,26.51 146.88,27.91 147.47,29.35 147.99,30.82 148.44,32.31 148.8,33.82 149.08,35.35 149.29,36.89 149.41,38.44 149.45,40 149.41,41.56 149.29,43.11 149.08,44.65 148.8,46.18 148.44,47.69 147.99,49.18 147.47,50.65 146.88,52.09 146.21,53.49 145.47,54.86 144.65,56.19 143.77,57.47 142.82,58.71 141.81,59.89 140.74,61.02 139.61,62.09 138.43,63.1 137.2,64.05 135.91,64.93 134.59,65.74 133.22,66.49 131.82,67.16 130.38,67.75 128.91,68.27 127.42,68.71 125.9,69.07 124.37,69.36 122.83,69.56 121.28,69.68 119.72,69.72 118.17,69.68 116.62,69.56 115.07,69.36 113.54,69.07 112.03,68.71 110.54,68.27 109.07,67.75 107.63,67.16 106.23,66.49 104.86,65.74 103.53,64.93 102.25,64.05 101.02,63.1 99.84,62.09 98.71,61.02 97.63,59.89 96.62,58.71 95.68,57.47 94.8,56.19 93.98,54.86 93.24,53.49 92.57,52.09 91.97,50.65 91.45,49.18 91.01,47.69 90.65,46.18 90.37,44.65 90.16,43.11 90.04,41.56
  Top Layer region: 10.28,40 10.32,38.44 10.44,36.89 10.64,35.35 10.93,33.82 11.29,32.31 11.73,30.82 12.25,29.35 12.85,27.91 13.52,26.51 14.26,25.14 15.07,23.81 15.95,22.53 16.9,21.29 17.91,20.11 18.98,18.98 20.11,17.91 21.29,16.9 22.53,15.95 23.81,15.07 25.14,14.26 26.51,13.51 27.91,12.84 29.35,12.25 30.82,11.73 32.31,11.29 33.82,10.93 35.35,10.64 36.89,10.44 38.45,10.32 40,10.28 41.56,10.32 43.11,10.44 44.65,10.64 46.18,10.93 47.69,11.29 49.19,11.73 50.65,12.25 52.09,12.84 53.49,13.51 54.86,14.26 56.19,15.07 57.47,15.95 58.71,16.9 59.89,17.91 61.02,18.98 62.09,20.11 63.1,21.29 64.05,22.53 64.93,23.81 65.74,25.14 66.49,26.51 67.15,27.91 67.75,29.35 68.27,30.82 68.71,32.31 69.07,33.82 69.36,35.35 69.56,36.89 69.68,38.44 69.72,40 69.68,41.56 69.56,43.11 69.36,44.65 69.07,46.18 68.71,47.69 68.27,49.18 67.75,50.65 67.15,52.09 66.49,53.49 65.74,54.86 64.93,56.19 64.05,57.47 63.1,58.71 62.09,59.89 61.02,61.02 59.89,62.09 58.71,63.1 57.47,64.05 56.19,64.93 54.86,65.74 53.49,66.49 52.09,67.16 50.65,67.75 49.19,68.27 47.69,68.71 46.18,69.07 44.65,69.36 43.11,69.56 41.56,69.68 40,69.72 38.45,69.68 36.89,69.56 35.35,69.36 33.82,69.07 32.31,68.71 30.82,68.27 29.35,67.75 27.91,67.16 26.51,66.49 25.14,65.74 23.81,64.93 22.53,64.05 21.29,63.1 20.11,62.09 18.98,61.02 17.91,59.89 16.9,58.71 15.95,57.47 15.07,56.19 14.26,54.86 13.52,53.49 12.85,52.09 12.25,50.65 11.73,49.18 11.29,47.69 10.93,46.18 10.64,44.65 10.44,43.11 10.32,41.56
  Top Layer region: -70,40 -69.96,38.44 -69.84,36.89 -69.63,35.35 -69.35,33.82 -68.99,32.31 -68.55,30.82 -68.03,29.35 -67.43,27.91 -66.76,26.51 -66.02,25.14 -65.2,23.81 -64.32,22.53 -63.38,21.29 -62.37,20.11 -61.29,18.98 -60.16,17.91 -58.98,16.9 -57.75,15.95 -56.47,15.07 -55.14,14.26 -53.77,13.51 -52.37,12.84 -50.93,12.25 -49.46,11.73 -47.97,11.29 -46.46,10.93 -44.93,10.64 -43.38,10.44 -41.83,10.32 -40.28,10.28 -38.72,10.32 -37.17,10.44 -35.63,10.64 -34.1,10.93 -32.58,11.29 -31.09,11.73 -29.62,12.25 -28.18,12.84 -26.78,13.51 -25.41,14.26 -24.09,15.07 -22.8,15.95 -21.57,16.9 -20.39,17.91 -19.26,18.98 -18.19,20.11 -17.18,21.29 -16.23,22.53 -15.35,23.81 -14.53,25.14 -13.79,26.51 -13.12,27.91 -12.53,29.35 -12.01,30.82 -11.56,32.31 -11.2,33.82 -10.92,35.35 -10.71,36.89 -10.59,38.44 -10.55,40 -10.59,41.56 -10.71,43.11 -10.92,44.65 -11.2,46.18 -11.56,47.69 -12.01,49.18 -12.53,50.65 -13.12,52.09 -13.79,53.49 -14.53,54.86 -15.35,56.19 -16.23,57.47 -17.18,58.71 -18.19,59.89 -19.26,61.02 -20.39,62.09 -21.57,63.1 -22.8,64.05 -24.09,64.93 -25.41,65.74 -26.78,66.49 -28.18,67.16 -29.62,67.75 -31.09,68.27 -32.58,68.71 -34.1,69.07 -35.63,69.36 -37.17,69.56 -38.72,69.68 -40.28,69.72 -41.83,69.68 -43.38,69.56 -44.93,69.36 -46.46,69.07 -47.97,68.71 -49.46,68.27 -50.93,67.75 -52.37,67.16 -53.77,66.49 -55.14,65.74 -56.47,64.93 -57.75,64.05 -58.98,63.1 -60.16,62.09 -61.29,61.02 -62.37,59.89 -63.38,58.71 -64.32,57.47 -65.2,56.19 -66.02,54.86 -66.76,53.49 -67.43,52.09 -68.03,50.65 -68.55,49.18 -68.99,47.69 -69.35,46.18 -69.63,44.65 -69.84,43.11 -69.96,41.56
  Top Layer region: -150,40 -149.96,38.44 -149.84,36.89 -149.63,35.35 -149.35,33.82 -148.99,32.31 -148.55,30.82 -148.03,29.35 -147.43,27.91 -146.76,26.51 -146.02,25.14 -145.2,23.81 -144.32,22.53 -143.38,21.29 -142.37,20.11 -141.29,18.98 -140.16,17.91 -138.98,16.9 -137.75,15.95 -136.47,15.07 -135.14,14.26 -133.77,13.51 -132.37,12.84 -130.93,12.25 -129.46,11.73 -127.97,11.29 -126.46,10.93 -124.93,10.64 -123.38,10.44 -121.83,10.32 -120.28,10.28 -118.72,10.32 -117.17,10.44 -115.63,10.64 -114.1,10.93 -112.58,11.29 -111.09,11.73 -109.62,12.25 -108.18,12.84 -106.78,13.51 -105.41,14.26 -104.09,15.07 -102.8,15.95 -101.57,16.9 -100.39,17.91 -99.26,18.98 -98.19,20.11 -97.18,21.29 -96.23,22.53 -95.35,23.81 -94.53,25.14 -93.79,26.51 -93.12,27.91 -92.53,29.35 -92.01,30.82 -91.56,32.31 -91.2,33.82 -90.92,35.35 -90.71,36.89 -90.59,38.44 -90.55,40 -90.59,41.56 -90.71,43.11 -90.92,44.65 -91.2,46.18 -91.56,47.69 -92.01,49.18 -92.53,50.65 -93.12,52.09 -93.79,53.49 -94.53,54.86 -95.35,56.19 -96.23,57.47 -97.18,58.71 -98.19,59.89 -99.26,61.02 -100.39,62.09 -101.57,63.1 -102.8,64.05 -104.09,64.93 -105.41,65.74 -106.78,66.49 -108.18,67.16 -109.62,67.75 -111.09,68.27 -112.58,68.71 -114.1,69.07 -115.63,69.36 -117.17,69.56 -118.72,69.68 -120.28,69.72 -121.83,69.68 -123.38,69.56 -124.93,69.36 -126.46,69.07 -127.97,68.71 -129.46,68.27 -130.93,67.75 -132.37,67.16 -133.77,66.49 -135.14,65.74 -136.47,64.93 -137.75,64.05 -138.98,63.1 -140.16,62.09 -141.29,61.02 -142.37,59.89 -143.38,58.71 -144.32,57.47 -145.2,56.19 -146.02,54.86 -146.76,53.49 -147.43,52.09 -148.03,50.65 -148.55,49.18 -148.99,47.69 -149.35,46.18 -149.63,44.65 -149.84,43.11 -149.96,41.56
  Top Layer region: -230,40 -229.96,38.44 -229.84,36.89 -229.63,35.35 -229.35,33.82 -228.99,32.31 -228.55,30.82 -228.03,29.35 -227.43,27.91 -226.76,26.51 -226.02,25.14 -225.2,23.81 -224.32,22.53 -223.38,21.29 -222.37,20.11 -221.29,18.98 -220.16,17.91 -218.98,16.9 -217.75,15.95 -216.47,15.07 -215.14,14.26 -213.77,13.51 -212.37,12.84 -210.93,12.25 -209.46,11.73 -207.97,11.29 -206.46,10.93 -204.93,10.64 -203.38,10.44 -201.83,10.32 -200.28,10.28 -198.72,10.32 -197.17,10.44 -195.63,10.64 -194.1,10.93 -192.58,11.29 -191.09,11.73 -189.62,12.25 -188.18,12.84 -186.78,13.51 -185.41,14.26 -184.09,15.07 -182.8,15.95 -181.57,16.9 -180.39,17.91 -179.26,18.98 -178.19,20.11 -177.18,21.29 -176.23,22.53 -175.35,23.81 -174.53,25.14 -173.79,26.51 -173.12,27.91 -172.53,29.35 -172.01,30.82 -171.56,32.31 -171.2,33.82 -170.92,35.35 -170.71,36.89 -170.59,38.44 -170.55,40 -170.59,41.56 -170.71,43.11 -170.92,44.65 -171.2,46.18 -171.56,47.69 -172.01,49.18 -172.53,50.65 -173.12,52.09 -173.79,53.49 -174.53,54.86 -175.35,56.19 -176.23,57.47 -177.18,58.71 -178.19,59.89 -179.26,61.02 -180.39,62.09 -181.57,63.1 -182.8,64.05 -184.09,64.93 -185.41,65.74 -186.78,66.49 -188.18,67.16 -189.62,67.75 -191.09,68.27 -192.58,68.71 -194.1,69.07 -195.63,69.36 -197.17,69.56 -198.72,69.68 -200.28,69.72 -201.83,69.68 -203.38,69.56 -204.93,69.36 -206.46,69.07 -207.97,68.71 -209.46,68.27 -210.93,67.75 -212.37,67.16 -213.77,66.49 -215.14,65.74 -216.47,64.93 -217.75,64.05 -218.98,63.1 -220.16,62.09 -221.29,61.02 -222.37,59.89 -223.38,58.71 -224.32,57.47 -225.2,56.19 -226.02,54.86 -226.76,53.49 -227.43,52.09 -228.03,50.65 -228.55,49.18 -228.99,47.69 -229.35,46.18 -229.63,44.65 -229.84,43.11 -229.96,41.56
  Top Layer region: -310,40 -309.96,38.44 -309.84,36.89 -309.63,35.35 -309.35,33.82 -308.99,32.31 -308.55,30.82 -308.03,29.35 -307.43,27.91 -306.76,26.51 -306.02,25.14 -305.2,23.81 -304.32,22.53 -303.38,21.29 -302.37,20.11 -301.29,18.98 -300.16,17.91 -298.98,16.9 -297.75,15.95 -296.47,15.07 -295.14,14.26 -293.77,13.51 -292.37,12.84 -290.93,12.25 -289.46,11.73 -287.97,11.29 -286.46,10.93 -284.93,10.64 -283.38,10.44 -281.83,10.32 -280.28,10.28 -278.72,10.32 -277.17,10.44 -275.63,10.64 -274.1,10.93 -272.58,11.29 -271.09,11.73 -269.62,12.25 -268.18,12.84 -266.78,13.51 -265.41,14.26 -264.09,15.07 -262.8,15.95 -261.57,16.9 -260.39,17.91 -259.26,18.98 -258.19,20.11 -257.18,21.29 -256.23,22.53 -255.35,23.81 -254.53,25.14 -253.79,26.51 -253.12,27.91 -252.53,29.35 -252.01,30.82 -251.56,32.31 -251.2,33.82 -250.92,35.35 -250.71,36.89 -250.59,38.44 -250.55,40 -250.59,41.56 -250.71,43.11 -250.92,44.65 -251.2,46.18 -251.56,47.69 -252.01,49.18 -252.53,50.65 -253.12,52.09 -253.79,53.49 -254.53,54.86 -255.35,56.19 -256.23,57.47 -257.18,58.71 -258.19,59.89 -259.26,61.02 -260.39,62.09 -261.57,63.1 -262.8,64.05 -264.09,64.93 -265.41,65.74 -266.78,66.49 -268.18,67.16 -269.62,67.75 -271.09,68.27 -272.58,68.71 -274.1,69.07 -275.63,69.36 -277.17,69.56 -278.72,69.68 -280.28,69.72 -281.83,69.68 -283.38,69.56 -284.93,69.36 -286.46,69.07 -287.97,68.71 -289.46,68.27 -290.93,67.75 -292.37,67.16 -293.77,66.49 -295.14,65.74 -296.47,64.93 -297.75,64.05 -298.98,63.1 -300.16,62.09 -301.29,61.02 -302.37,59.89 -303.38,58.71 -304.32,57.47 -305.2,56.19 -306.02,54.86 -306.76,53.49 -307.43,52.09 -308.03,50.65 -308.55,49.18 -308.99,47.69 -309.35,46.18 -309.63,44.65 -309.84,43.11 -309.96,41.56
  Top Layer region: -389.72,40 -389.68,38.44 -389.56,36.89 -389.36,35.35 -389.07,33.82 -388.71,32.31 -388.27,30.82 -387.75,29.35 -387.15,27.91 -386.48,26.51 -385.74,25.14 -384.93,23.81 -384.05,22.53 -383.1,21.29 -382.09,20.11 -381.02,18.98 -379.89,17.91 -378.71,16.9 -377.47,15.95 -376.19,15.07 -374.86,14.26 -373.49,13.52 -372.09,12.85 -370.65,12.25 -369.18,11.73 -367.69,11.29 -366.18,10.93 -364.65,10.64 -363.11,10.44 -361.56,10.32 -360,10.28 -358.44,10.32 -356.89,10.44 -355.35,10.64 -353.82,10.93 -352.31,11.29 -350.82,11.73 -349.35,12.25 -347.91,12.85 -346.51,13.52 -345.14,14.26 -343.81,15.07 -342.53,15.95 -341.29,16.9 -340.11,17.91 -338.98,18.98 -337.91,20.11 -336.9,21.29 -335.95,22.53 -335.07,23.81 -334.26,25.14 -333.52,26.51 -332.85,27.91 -332.25,29.35 -331.73,30.82 -331.29,32.31 -330.93,33.82 -330.64,35.35 -330.44,36.89 -330.32,38.44 -330.28,40 -330.32,41.56 -330.44,43.11 -330.64,44.65 -330.93,46.18 -331.29,47.69 -331.73,49.18 -332.25,50.65 -332.85,52.09 -333.52,53.49 -334.26,54.86 -335.07,56.19 -335.95,57.47 -336.9,58.71 -337.91,59.89 -338.98,61.02 -340.11,62.09 -341.29,63.1 -342.53,64.05 -343.81,64.93 -345.14,65.74 -346.51,66.48 -347.91,67.15 -349.35,67.75 -350.82,68.27 -352.31,68.71 -353.82,69.07 -355.35,69.36 -356.89,69.56 -358.44,69.68 -360,69.72 -361.56,69.68 -363.11,69.56 -364.65,69.36 -366.18,69.07 -367.69,68.71 -369.18,68.27 -370.65,67.75 -372.09,67.15 -373.49,66.48 -374.86,65.74 -376.19,64.93 -377.47,64.05 -378.71,63.1 -379.89,62.09 -381.02,61.02 -382.09,59.89 -383.1,58.71 -384.05,57.47 -384.93,56.19 -385.74,54.86 -386.48,53.49 -387.15,52.09 -387.75,50.65 -388.27,49.18 -388.71,47.69 -389.07,46.18 -389.36,44.65 -389.56,43.11 -389.68,41.56
  silkscreen extent -410,-90 410,90
C0603 [mm]
  rect 0.8x0.9 smd paste+0 mask+0.051: 1(-0.7,0) 2(0.7,0)
  silkscreen extent -1.41,-0.71 1.39,0.72
HDR-M-2.54_1X4 [mil]
  rect 62x62 hole 35 paste+0 mask+2: 1(-150,0)
  round 62 hole 35 paste+0 mask+2: 2(-50,0) 3(50,0) 4(150,0)
  silkscreen extent -200,-50 200,50
HDR-M-2.54_1X6 [mil]
  rect 62x62 hole 35 paste+0 mask+2: 1(-250,0)
  round 62 hole 35 paste+0 mask+2: 2(-150,0) 3(-50,0) 4(50,0) 5(150,0) 6(250,0)
  silkscreen extent -300,-50 300,50
IMPORTED_IMAGE [mil]
  silkscreen extent 0,-315 315,0
LED0603-FD_GREEN [mm]
  rect 0.9x1 smd paste+0 mask+0.051: 1(-0.85,0) 2(0.85,0)
  silkscreen extent -1.55,-0.75 1.75,0.75
LED0603-R-RD_BLUE [mm]
  rect 0.8x0.8 smd paste+0 mask+0.051: 1(0.851,0) 2(-0.851,0)
  silkscreen extent -1.82,-0.86 1.77,0.86
LED0603-RD_RED [mm]
  rect 0.8x0.8 smd paste+0 mask+0.051: 1(-0.799,-0.003) 2(0.799,0.004)
  silkscreen extent -1.49,-0.75 1.39,0.76
MECHA_GPIO_40PIN_HEADER [mm]
  rect 1x2 smd paste+0 mask+0.102: 1(24.13,3.302) 2(24.13,-3.048) 3(21.59,3.302) 4(21.59,-3.048) 5(19.05,3.302) 6(19.05,-3.048) 7(16.51,3.302) 8(16.51,-3.048) 9(13.97,3.302) 10(13.97,-3.048) 11(11.43,3.302) 12(11.43,-3.048) 13(8.89,3.302) 14(8.89,-3.048) 15(6.35,3.302) 16(6.35,-3.048) 17(3.81,3.302) 18(3.81,-3.048) 19(1.27,3.302) 20(1.27,-3.048) 21(-1.27,3.302) 22(-1.27,-3.048) 23(-3.81,3.302) 24(-3.81,-3.048) 25(-6.35,3.302) 26(-6.35,-3.048) 27(-8.89,3.302) 28(-8.89,-3.048) 29(-11.43,3.302) 30(-11.43,-3.048) 31(-13.97,3.302) 32(-13.97,-3.048) 33(-16.51,3.302) 34(-16.51,-3.048) 35(-19.05,3.302) 36(-19.05,-3.048) 37(-21.59,3.302) 38(-21.59,-3.048) 39(-24.13,3.302) 40(-24.13,-3.048)
  silkscreen extent -25.4,-2.41 25.4,2.67
R0603 [mil]
  rect 31.75x34.02 smd paste-3937.01 mask+2: 1(-29.66,0) 2(29.66,0)
  silkscreen extent -55,-26 55,26
USB-C-SMD_TYPE-C-31-M-23 [mm]
  rect 0.5x1.3 smd paste-100 mask+0.05: 1(-3.28,2.206) 3(-2.01,2.206) 10(2.01,2.206) 12(3.28,2.206)
  rect 0.35x1.3 smd paste-100 mask+0.05: 2(-2.65,2.206) 4(-1.375,2.206) 5(-0.825,2.206) 6(-0.275,2.206) 7(0.275,2.206) 8(0.825,2.206) 9(1.375,2.206) 11(2.65,2.206)
  oval 1x1.6 hole 0.61 slot 1.3 at 90 deg paste+0 mask+0.05: 13(-4.325,1.734) 16(4.325,1.734)
  oval 1x1.8 hole 0.61 slot 1.5 at 90 deg paste+0 mask+0.05: 14(-4.325,-2.206) 15(4.325,-2.206)
  silkscreen extent -4.5,-4.17 4.5,2.65
WQFN-28_L5.0-W5.0-P0.50-BL-EP3.2 [mm]
  oval 0.28x0.9 smd paste-100 mask+0.051: 1(-1.501,-2.5) 2(-1.001,-2.5) 3(-0.501,-2.5) 4(0,-2.5) 5(0.5,-2.5) 6(1.001,-2.5) 7(1.501,-2.5) 15(1.501,2.5) 16(1.001,2.5) 17(0.5,2.5) 18(0,2.5) 19(-0.501,2.5) 20(-1.001,2.5) 21(-1.501,2.5)
  oval 0.9x0.28 smd paste-100 mask+0.051: 8(2.5,-1.501) 9(2.5,-1.001) 10(2.5,-0.5) 11(2.5,0) 12(2.5,0.5) 13(2.5,1.001) 14(2.5,1.501) 22(-2.5,1.501) 23(-2.5,1.001) 24(-2.5,0.5) 25(-2.5,0) 26(-2.5,-0.5) 27(-2.5,-1.001) 28(-2.5,-1.501)
  rect 3.2x3.2 smd paste-100 mask+0.051: 29(0,0)
  silkscreen extent -2.65,-3.3 2.65,2.65
? [mil]

## Via types
v1: diameter 24, hole 12, Top Layer to Bottom Layer, 59 vias